# Altium PCB Peripheral_Processor_PCB_V2.PcbDoc (part 3 of 3)
Units mil, origin at the board's own origin, x right, y up, seen from the top; angles counter-clockwise.
Board outline 5600 x 4000 mil, 4 copper layers (Top Layer, Plane(Gnd), Plane(Power), Bottom Layer), stack 23.756 mil thick; 207 components, 234 nets, 739 pads, 214 vias.
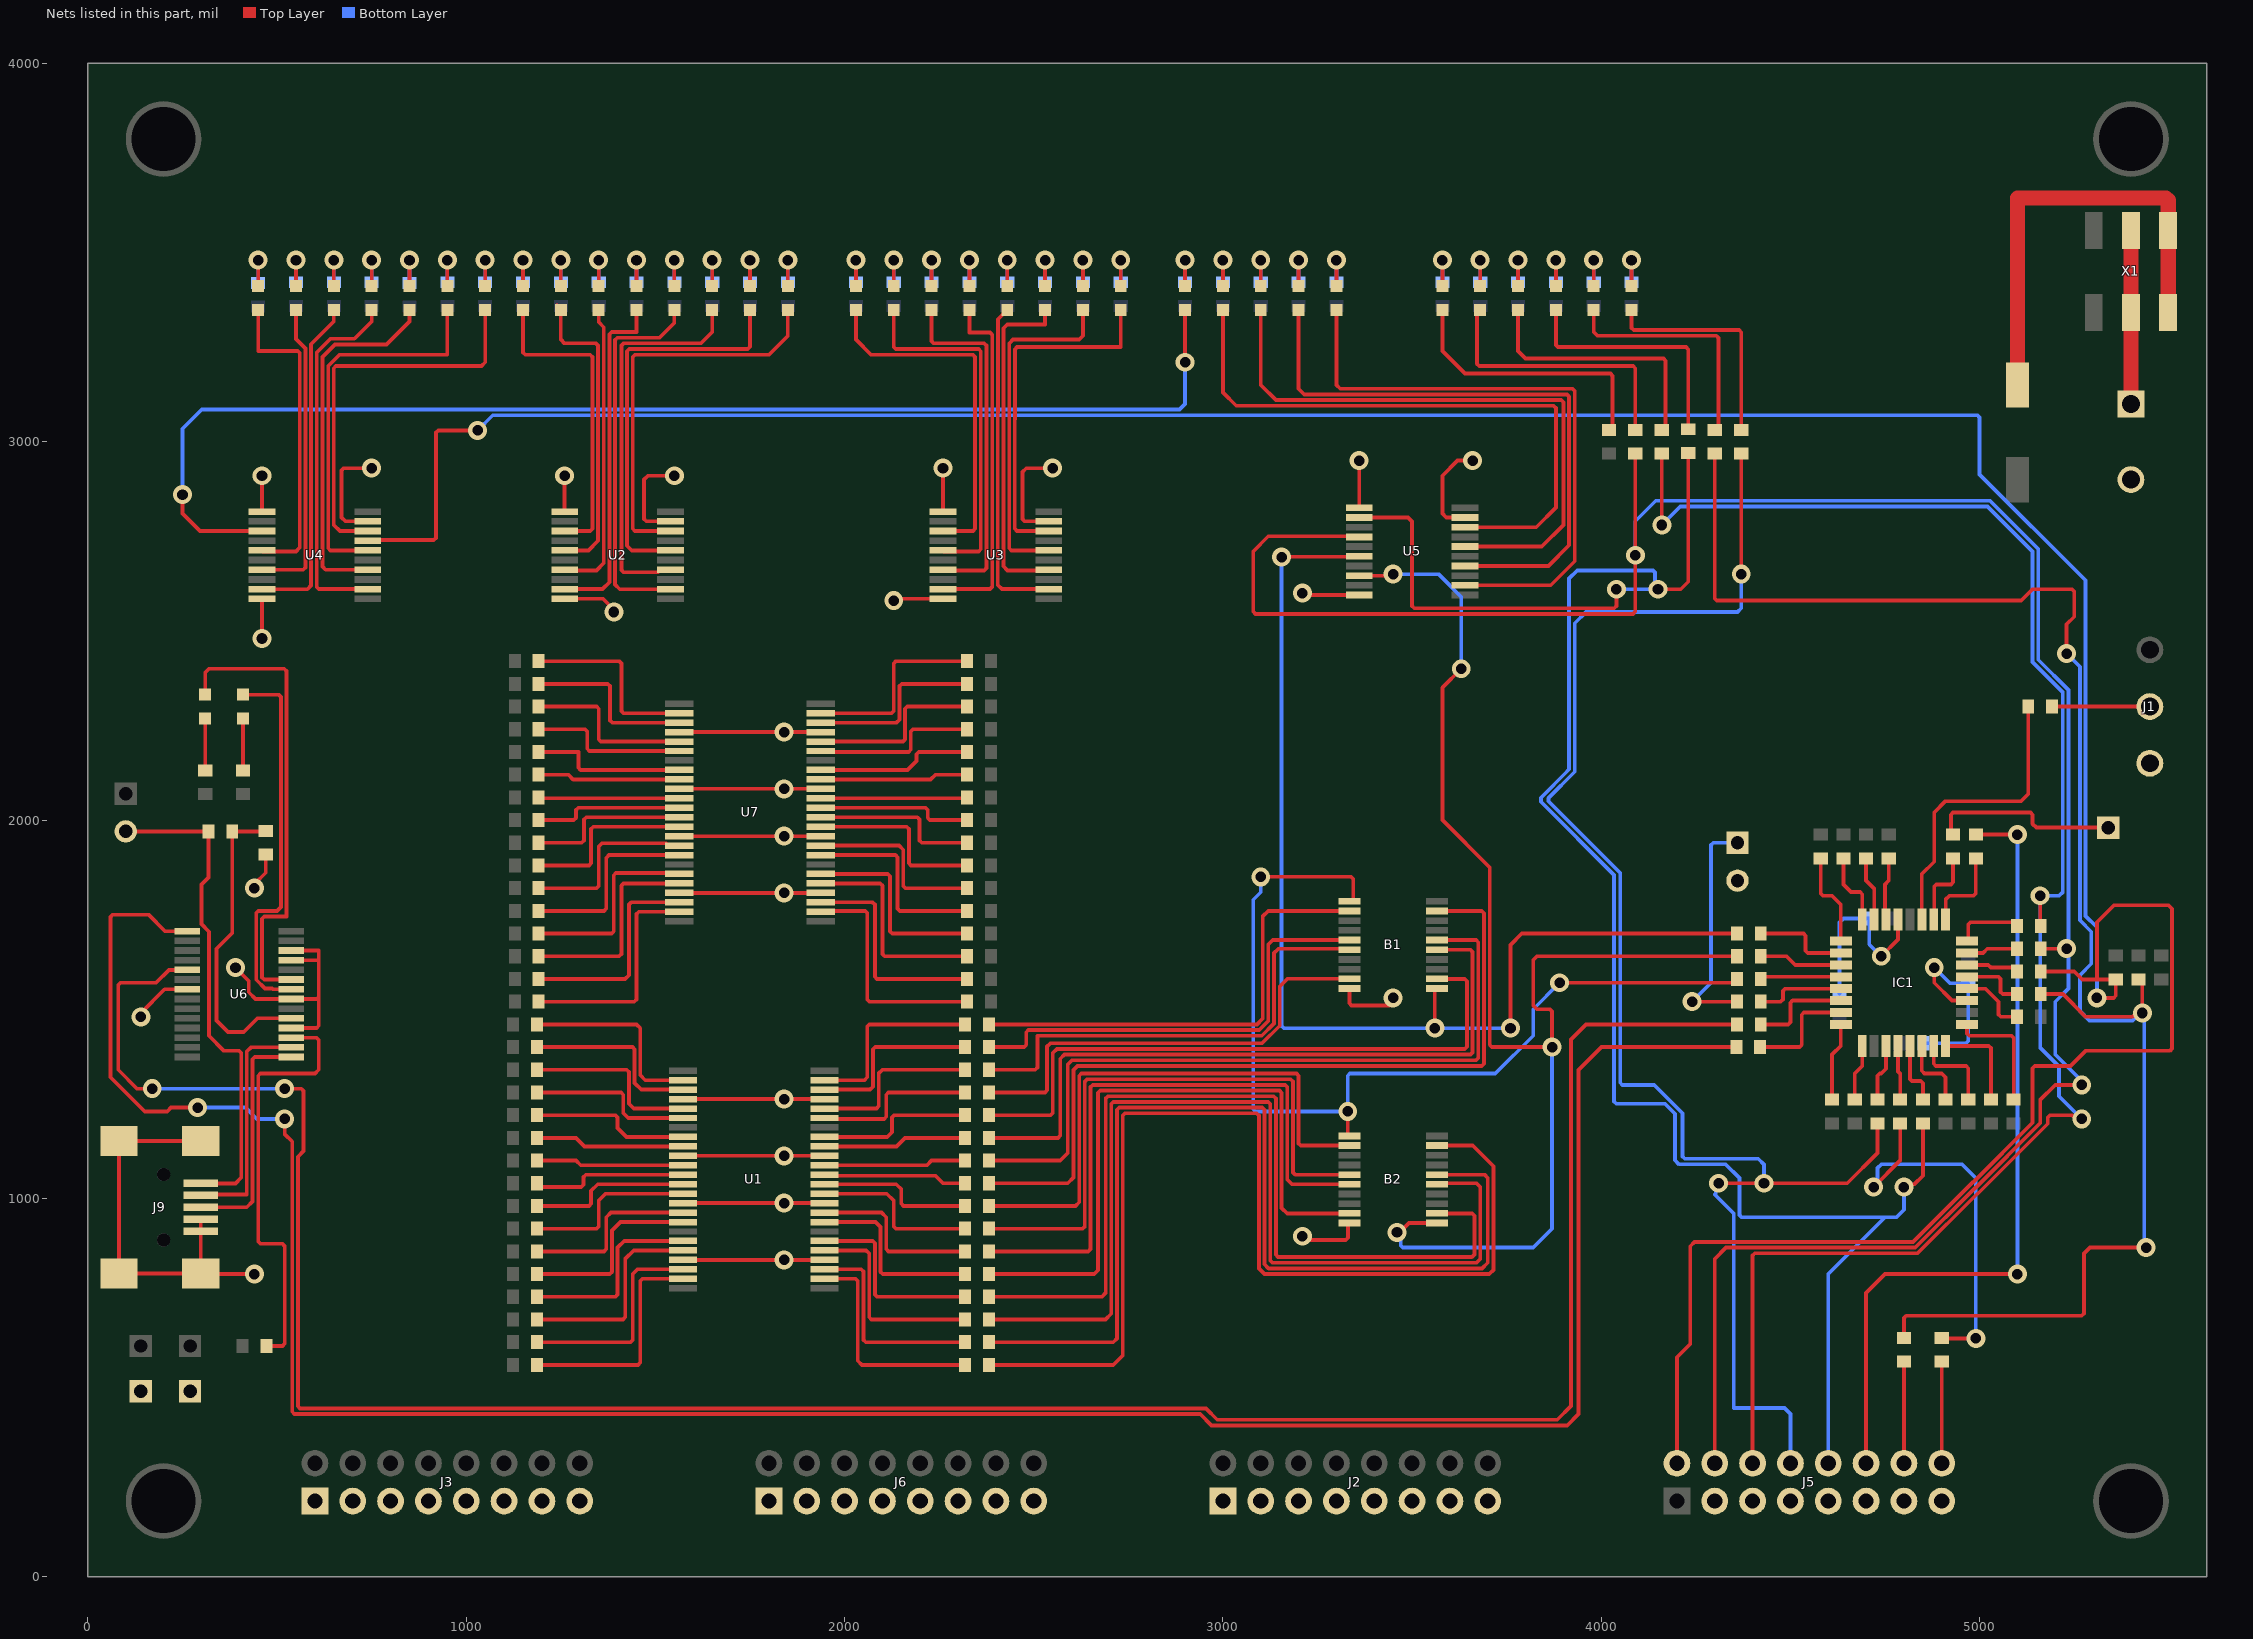
[diagram p4: the nets of this part, all layers, seen from the top]

## Via types
v1: diameter 50, hole 28, Top Layer to Bottom Layer, 214 vias

## Nets (pads, with @x,y where several pads share a name; then routed paths per layer and width w, separated by ;. In a path a pad name is that pad's centre, name@x,y a point inside that pad or via, vN(x,y) a via of type N, cw(c..) or ccw(c..) an arc to the next point about the centre after c; other vN are vias at no path point) (continued)
GND: B1.10 B2.10 C8.2 C9.2 C10.2 C11.2 IC1.19 IC1.29 J1.3 J2.1 J2.3 J2.5 J2.7 J2.9 J2.11 J2.13 J2.15 J3.1 J3.3 J3.5 J3.7 J3.9 J3.11 J3.13 J3.15 J4.2 J5.3 J5.5 J5.7 J5.9 J5.11 J5.13 J5.15 J6.1 J6.3 J6.5 J6.7 J6.9 J6.11 J6.13 J6.15 J7.2 J9.4 J9.5 J9.6 J9.7 J9.8 J9.9 R106.1 TP8.1 TP9.1 U1.4 U1.10 U1.15 U1.21 U1.28 U1.34 U1.39 U1.45 U2.1 U2.10 U2.19 U3.1 U3.10 U3.19 U4.1 U4.10 U4.19 U5.1 U5.10 U5.19 U6.7 U6.18 U6.21 U6.25 U6.26 U7.4 U7.10 U7.15 U7.21 U7.28 U7.34 U7.39 U7.45 | length 8432.5
  Top Layer w10: v1(140,1480) 140,1490 202.8,1552.8 U6.7@262.2,1552.8 ; J9.4@298.43,945.12 J9.5@298.43,913.62 J9.6@298.43,801.42 ; J9.9@298.43,1151.81 J9.8@81.89,1151.81 J9.7@81.89,801.42 J9.6@298.43,801.42 ; v1@390,1609.18 v1(390,1610) 425,1575 425,1545 442.8,1527.2 U6.21@537.8,1527.2 604.14,1527.2 610,1533.06 ; v1(440,800) 299.84,800 J9.6@298.43,801.42 ; v1(440,1820) 440,1830.82 470,1860.82 R106.1@470,1908.5 ; v1(460,2480) 460.24,2480.24 U4.10@460.24,2584.84 ; v1(460,2910) 460.24,2909.76 U4.1@460.24,2815.16 ; U6.18@537.8,1450.43 604.14,1450.43 610,1456.29 610,1533.06 ; U6.25@537.8,1629.57 609.57,1629.57 610,1630 ; U6.26@537.8,1655.16 610,1655.16 610,1630 ; U4.19@739.76,2789.57 680.43,2789.57 670,2800 670,2924.14 675.86,2930 v1(750,2930) ; v1(1260,2910) 1260,2815.39 U2.1@1260.24,2815.16 ; U2.10@1260.24,2584.84 1361.2,2584.84 1390,2556.05 v1(1390,2550) ; U2.19@1539.76,2789.57 1475.86,2789.57 1470,2795.42 1470,2900 1480,2910 v1(1550,2910) ; U7.45@1562.99,1807.48 v1(1840,1807.48) U7.4@1937.01,1807.48 ; U7.39@1562.99,1957.48 v1(1840,1957.48) U7.10@1937.01,1957.48 ; U7.34@1562.99,2082.52 v1(1840,2082.52) U7.15@1937.01,2082.52 ; U7.28@1562.99,2232.52 v1(1840,2232.52) U7.21@1937.01,2232.52 ; U1.21@1572.99,837.48 v1(1840,837.48) U1.28@1947.01,837.48 ; U1.15@1572.99,987.48 v1(1840,987.48) U1.34@1947.01,987.48 ; U1.10@1572.99,1112.52 v1(1840,1112.52) U1.39@1947.01,1112.52 ; U1.4@1572.99,1262.52 v1(1840,1262.52) U1.45@1947.01,1262.52 ; v1(2130,2580) 2134.84,2584.84 U3.10@2260.24,2584.84 ; v1(2260,2930) 2260.24,2929.76 U3.1@2260.24,2815.16 ; U3.19@2539.76,2789.57 2475.86,2789.57 2470,2795.42 2470,2920 2480,2930 v1(2550,2930) ; v1(3210,900) 3210,895.86 3215.86,890 3324.84,890 3330.7,895.86 3330.7,930.98 3334.33,934.61 B2.10@3334.33,934.84 ; v1(3210,2600) 3215.86,2594.14 3224.14,2594.14 3224.84,2594.84 U5.10@3360.24,2594.84 ; B1.10@3334.33,1554.84 3334.33,1515.86 3340.19,1510 3440,1510 3450,1520 v1(3450,1530) ; v1(3360,2950) 3360.24,2949.76 U5.1@3360.24,2825.16 ; U5.19@3639.76,2799.57 3590.43,2799.57 3580,2810 3580,2910 3620,2950 v1(3660,2950) ; v1(4740,1640) 4784.25,1684.25 IC1.29@4784.25,1736.85 ; v1(4880,1610) 4880,1570 4927.24,1522.76 IC1.19@4966.85,1522.76 ; 610,1533.06 610,1630
  Bottom Layer w10: C10.2@4630,1541.5 4630,1730 4640,1740 C11.2@4708.5,1740 4708.5,1671.5 v1(4740,1640) ; C9.2@4851.5,1410 4964.14,1410 4970,1415.86 C8.2@4970,1568.5 4921.5,1568.5 v1(4880,1610)
High_Address_Clk: B2.11 R24.1 U5.8 | length 3591.1
  Top Layer w10: U5.8@3360.24,2646.02 3446.02,2646.02 v1(3450,2650) ; v1(3460,910) 3466.88,910 3491.73,934.84 B2.11@3565.67,934.84 ; v1(3630,2400) 3580,2350 3580,2000 3705,1875 3705,1405.86 3710.86,1400 v1(3870,1400) 3870,1494.14 3864.14,1500 3830,1500 3820,1510 3820,1630 3830,1640 R24.1@4358.5,1640
  Bottom Layer w10: v1(3450,2650) 3570,2650 3630,2590 v1(3630,2400) ; v1(3460,910) 3470,900 3470,875.86 3475.86,870 3820,870 3870,920 v1(3870,1400)
HostReset#: R2.1 R29.2 R56.1 R97.1 | length 4571.7
  Top Layer w10: R97.1@4300,2968.5 4300,2585.86 4305.86,2580 5110,2580 5140,2610 5244.14,2610 5250,2604.14 5250,2537.48 5230,2517.48 v1(5230,2440) ; R56.1@4800,631.5 4800,684.14 4805.86,690 5270,690 5275.86,695.86 5275.86,854.14 5291.72,870 v1(5440,870) ; R29.2@5161.5,1540 5220,1540 5280,1480 5404.14,1480 5406.49,1482.35 5422.35,1482.35 v1(5430,1490) v1@5420,1500 ; R2.1@5420,1578.5 5430,1568.5 5430,1508.48 v1@5421.52,1500
  Bottom Layer w10: v1(5230,2440) 5265,2405 5265,1735 5295,1705 5295,1620 5265,1590 5265,1495 5290,1470 5404.14,1470 5419.14,1485 v1@5425,1485 ; v1(5430,1490) v1@5425,1485 ; v1(5440,870) 5435,875 5435,1475 v1@5425,1485
JLink_Mode: J5.8 R113.2 R141.1 | length 4210.1
  Top Layer w10: v1(4310,1040) 4650,1040 4730,1120 R113.2@4730,1198.5 ; v1(4370,2650) R141.1@4370,2968.5
  Bottom Layer w10: v1(4310,1040) 4302.35,1032.35 4302.35,1012.35 4300,1010 4350,960 4350,445.86 4484.14,445.86 4500,430 J5.8@4500,300 ; v1(4370,2650) 4370,2560 4360,2550 3960,2550 3930,2520 3930,2127.57 3860.36,2057.93 3860.36,2049.64 4050,1860 4050,1305.86 4055.86,1300 4140,1300 4215,1225 4215,1110.86 4220.86,1105 4415,1105 4430,1090 v1(4430,1040)
Latch_CLR: B1.1 B2.1 R28.1 | length 2524.6
  Top Layer w10: v1(3100,1850) 3338.35,1850 3344.21,1844.14 3344.21,1789.02 3340.35,1785.16 B1.1@3334.33,1785.16 ; v1(3330,1230) 3330,1169.02 3333.86,1165.16 B2.1@3334.33,1165.16 ; v1(3890,1570) 4348.5,1570 R28.1@4358.5,1580
  Bottom Layer w10: v1(3100,1850) 3100,1809.18 3080,1789.18 3080,1235.86 3085.86,1230 v1(3330,1230) 3330,1324.14 3335.86,1330 3720,1330 3820,1430 3820,1500 v1(3890,1570)
Low_Address_Clk: B1.11 R20.1 U5.6 | length 2991.9
  Top Layer w10: v1(3155,2695) 3156.1,2696.1 3359.13,2696.1 U5.6@3360.24,2697.2 ; v1(3560,1450) 3560,1550.98 3563.86,1554.84 B1.11@3565.67,1554.84 ; v1(3760,1450) 3760,1670 3790,1700 R20.1@4358.5,1700
  Bottom Layer w10: v1(3155,2695) 3155,1455.86 3160.86,1450 v1(3560,1450) v1(3760,1450)
NetB1_2: B1.2 R6.1 | length 1235.1
  Top Layer w10: R6.1@2381.5,1460 3090,1460 3105,1475 3105,1745 3119.57,1759.57 B1.2@3334.33,1759.57
NetB1_5: B1.5 R10.1 | length 1208
  Top Layer w10: R10.1@2381.5,1400 2474.14,1400 2480,1405.86 2480,1439.14 2485.86,1445 3096.21,1445 3120,1468.79 3120,1671.08 3131.72,1682.8 B1.5@3334.33,1682.8
NetB1_6: B1.6 R14.1 | length 1244.6
  Top Layer w10: R14.1@2381.5,1340 2504.14,1340 2510,1345.86 2510,1430 3102.43,1430 3135,1462.57 3135,1648.28 3146.72,1660 3331.54,1660 B1.6@3334.33,1657.2
NetB1_9: B1.9 R18.1 | length 1205.6
  Top Layer w10: R18.1@2381.5,1280 2529.5,1280 2535.36,1285.86 2535.36,1401.21 2544.14,1410 3103.64,1410 3150,1456.36 3150,1560 3170.43,1580.43 B1.9@3334.33,1580.43
NetB1_12: B1.12 R22.1 | length 1686.4
  Top Layer w10: R22.1@2381.5,1220 2544.5,1220 2550.36,1225.86 2550.36,1384.14 2561.21,1395 3639.14,1395 3645,1400.86 3645,1574.14 3639.14,1580 3566.1,1580 B1.12@3565.67,1580.43
NetB1_15: B1.15 R26.1 | length 1853.4
  Top Layer w10: R26.1@2381.5,1160 2564.14,1160 2570,1165.86 2570,1369.14 2580.86,1380 3654.14,1380 3660,1385.86 3660,1651.35 3654.14,1657.2 B1.15@3565.67,1657.2
NetB1_16: B1.16 R30.1 | length 1960.7
  Top Layer w10: R30.1@2381.5,1100 2570,1100 2590,1120 2590,1354.14 2600.86,1365 3669.14,1365 3675,1370.86 3675,1676.94 3669.14,1682.8 B1.16@3565.67,1682.8
NetB1_19: B1.19 R34.1 | length 2130.4
  Top Layer w10: R34.1@2381.5,1040 2590,1040 2605,1055 2605,1339.14 2615.86,1350 3684.14,1350 3690,1355.86 3690,1753.71 3684.14,1759.57 B1.19@3565.67,1759.57
NetB2_2: B2.2 R36.1 | length 1477.1
  Top Layer w10: R36.1@2381.5,980 2610,980 2620,990 2620,1324.14 2625.86,1330 3194.14,1330 3200,1324.14 3200,1145.42 3205.86,1139.57 B2.2@3334.33,1139.57
NetB2_5: B2.5 R38.1 | length 1586.3
  Top Layer w10: R38.1@2381.5,920 2629.14,920 2635,925.86 2635,1309.14 2640.86,1315 3179.14,1315 3185,1309.14 3185,1068.65 3190.86,1062.8 B2.5@3334.33,1062.8
NetB2_6: B2.6 R40.1 | length 1637.8
  Top Layer w10: R40.1@2381.5,860 2644.14,860 2650,865.86 2650,1294.14 2655.86,1300 3164.14,1300 3170,1294.14 3170,1050 3182.8,1037.2 B2.6@3334.33,1037.2
NetB2_9: B2.9 R43.1 | length 1741.5
  Top Layer w10: R43.1@2381.5,800 2660,800 2670,810 2670,1279.14 2675.86,1285 3149.14,1285 3155,1279.14 3155,975 3170,960 3333.9,960 B2.9@3334.33,960.43
NetB2_12: B2.12 R46.1 | length 2429.3
  Top Layer w10: R46.1@2381.5,740 2680,740 2690,750 2690,1264.14 2695.86,1270 3134.14,1270 3140,1264.14 3140,850.86 3145.86,845 3657.93,845 3665,852.07 3665,954.14 3659.14,960 3566.1,960 B2.12@3565.67,960.43
NetB2_15: B2.15 R49.1 | length 2593.2
  Top Layer w10: R49.1@2381.5,680 2690,680 2705,695 2705,1249.14 2710.86,1255 3119.14,1255 3125,1249.14 3125,835.86 3130.86,830 3670,830 3680,840 3680,1030 3670,1040 3568.46,1040 B2.15@3565.67,1037.2
NetB2_16: B2.16 R52.1 | length 2712.7
  Top Layer w10: R52.1@2381.5,620 2710,620 2720,630 2720,1234.14 2725.86,1240 3104.14,1240 3110,1234.14 3110,825.86 3120.86,815 3685,815 3700,830 3700,1054.14 3691.35,1062.8 B2.16@3565.67,1062.8
NetB2_19: B2.19 R54.1 | length 2843.8
  Top Layer w10: R54.1@2381.5,560 2710,560 2735,585 2735,1219.14 2740.86,1225 3089.14,1225 3095,1219.14 3095,815 3110,800 3704.14,800 3715,810.86 3715,1085 3660.43,1139.57 B2.19@3565.67,1139.57
NetD1_2: D1.2 X1.3 X1.4 | length 1191.9
  Top Layer w10: D1.2@5099.75,3150.25 D1.2@5100,3150 ; 5492.57,3644.14 5498.43,3638.28
  Top Layer w40: D1.2@5099.75,3150.25 5099.75,3644.14 5196.02,3644.14 5492.57,3644.14 ; X1.3@5498.43,3341.73 X1.4@5498.43,3558.27 5498.43,3638.28
NetIC1_1: IC1.1 R16.2 | length 254.4
  Top Layer w10: R16.2@4580,1898.5 4580,1805.86 4585.86,1800 4610,1800 4633.15,1776.85 IC1.1@4633.15,1680.24
NetIC1_2: IC1.2 R20.2 | length 256.1
  Top Layer w10: R20.2@4421.5,1700 4534.14,1700 4540,1694.14 4540,1654.6 4545.86,1648.74 IC1.2@4633.15,1648.74
NetIC1_3: IC1.3 R24.2 | length 221.1
  Top Layer w10: R24.2@4421.5,1640 4490,1640 4512.76,1617.24 IC1.3@4633.15,1617.24
NetIC1_4: IC1.4 R28.2 | length 214
  Top Layer w10: R28.2@4421.5,1580 4427.24,1585.75 IC1.4@4633.15,1585.75
NetIC1_5: IC1.5 R32.2 | length 239
  Top Layer w10: R32.2@4421.5,1520 4474.14,1520 4480,1525.86 4480,1548.39 4485.86,1554.25 IC1.5@4633.15,1554.25
NetIC1_6: IC1.6 R42.2 | length 267.5
  Top Layer w10: R42.2@4421.5,1460 4494.14,1460 4500,1465.86 4500,1516.9 4505.86,1522.76 IC1.6@4633.15,1522.76
NetIC1_7: IC1.7 R45.2 | length 297.5
  Top Layer w10: R45.2@4420,1400 4524.14,1400 4530,1405.86 4530,1485.4 4535.86,1491.26 IC1.7@4633.15,1491.26
NetIC1_8: IC1.8 R48.2 | length 207.9
  Top Layer w10: R48.2@4610,1261.5 4610,1380 4633.15,1403.15 IC1.8@4633.15,1459.76
NetIC1_9: IC1.9 R51.2 | length 149.8
  Top Layer w10: R51.2@4670,1261.5 4670,1330 4689.76,1349.76 IC1.9@4689.76,1403.15
NetIC1_11: IC1.11 R113.1 | length 153.5
  Top Layer w10: R113.1@4730,1261.5 4730,1324.14 4735.86,1330 4740,1330 4752.76,1342.76 IC1.11@4752.76,1403.15
NetIC1_12: IC1.12 R112.1 | length 144
  Top Layer w10: IC1.12@4784.25,1403.15 4784.25,1335.75 4790,1330 R112.1@4790,1261.5
NetIC1_13: IC1.13 R111.1 | length 169
  Top Layer w10: IC1.13@4815.75,1403.15 4815.75,1315.86 4821.61,1310 4844.14,1310 4850,1304.14 R111.1@4850,1261.5
NetIC1_14: IC1.14 R110.1 | length 194.3
  Top Layer w10: IC1.14@4847.24,1403.15 4847.24,1337.24 4854.49,1330 4900,1330 4910,1320 R110.1@4910,1261.5
NetIC1_15: IC1.15 R109.1 | length 226.1
  Top Layer w10: IC1.15@4878.74,1403.15 4878.74,1355.86 4884.6,1350 4964.14,1350 4970,1344.14 R109.1@4970,1261.5
NetIC1_16: IC1.16 R108.1 | length 258
  Top Layer w10: IC1.16@4910.24,1403.15 5024.14,1403.15 5030,1397.29 R108.1@5030,1261.5
NetIC1_17: IC1.17 R107.1 | length 314.6
  Top Layer w10: IC1.17@4966.85,1459.76 4966.85,1435.86 4972.71,1430 5084.14,1430 5090,1424.14 R107.1@5090,1261.5
NetIC1_20: IC1.20 R33.1 | length 182.4
  Top Layer w10: IC1.20@4966.85,1554.25 5015.75,1554.25 5050,1520 5050,1485.86 5055.86,1480 R33.1@5098.5,1480
NetIC1_21: IC1.21 R29.1 | length 170.5
  Top Layer w10: IC1.21@4966.85,1585.75 5049.56,1585.75 5055.42,1579.89 5055.42,1545.86 5061.28,1540 R29.1@5098.5,1540
NetIC1_22: IC1.22 R25.1 | length 138.8
  Top Layer w10: IC1.22@4966.85,1617.24 5022.76,1617.24 5030,1610 5088.5,1610 R25.1@5098.5,1600
NetIC1_23: IC1.23 R21.1 | length 136.3
  Top Layer w10: IC1.23@4966.85,1648.74 5008.74,1648.74 5020,1660 R21.1@5098.5,1660
NetIC1_24: IC1.24 R17.1 | length 180.3
  Top Layer w10: IC1.24@4966.85,1680.24 4970,1683.39 4970,1724.14 4975.86,1730 5088.5,1730 R17.1@5098.5,1720
NetIC1_25: IC1.25 R13.1 | length 232
  Top Layer w10: IC1.25@4910.24,1736.85 4910.24,1789.76 4920.47,1800 4984.14,1800 4990,1805.86 R13.1@4990,1898.5
NetIC1_26: IC1.26 R9.1 | length 205.3
  Top Layer w10: IC1.26@4878.74,1736.85 4880,1738.11 4880,1824.14 4885.86,1830 4924.14,1830 4930,1835.86 R9.1@4930,1898.5
NetIC1_27: IC1.27 R5.1 | length 796.8
  Top Layer w10: IC1.27@4847.24,1736.85 4847.24,1857.24 4880,1890 4880,2020 4910,2050 5110,2050 5128.5,2068.5 R5.1@5128.5,2300
NetIC1_30: IC1.30 R4.2 | length 166.9
  Top Layer w10: IC1.30@4752.76,1736.85 4750,1739.61 4750,1830 4760,1840 R4.2@4760,1898.5
NetIC1_31: IC1.31 R8.2 | length 170.5
  Top Layer w10: R8.2@4700,1898.5 4700,1840 4721.26,1818.74 IC1.31@4721.26,1736.85
NetIC1_32: IC1.32 R12.2 | length 196.6
  Top Layer w10: R12.2@4640,1898.5 4640,1830 4660,1810 4684.14,1810 4690,1804.14 4690,1737.09 IC1.32@4689.76,1736.85
NetJ5_14: J5.14 R56.2 | length 268.5
  Top Layer w10: J5.14@4800,300 R56.2@4800,568.5
NetJ5_16: J5.16 R57.2 | length 268.5
  Top Layer w10: J5.16@4900,300 R57.2@4900,568.5
NetJ7_1: J7.1 X1.2 X1.5 | length 458.3
  Top Layer w40: J7.1@5400,3100 X1.2@5400,3341.73 X1.5@5400,3558.27
NetJ8_2: J8.2 J9.1 R105.2 | length 1321.3
  Top Layer w10: J8.2@100,1970 R105.2@318.5,1970 318.5,1848.5 300,1830 300,1725.01 320,1705.01 320,1430 360,1390 400,1390 405,1385 405,1054.61 390,1039.61 J9.1@298.43,1039.61
NetLED1_1: LED1.1 U2.18 | length 1058.1
  Top Layer w10: U2.18@1539.76,2763.98 1445.86,2763.98 1440,2769.83 1440,3224.14 1445.86,3230 1800,3230 1850,3280 LED1.1@1850,3348.5
NetLED1_2: LED1.2 R58.1 | length 127
  Top Layer w10: LED1.2@1850,3411.5 v1(1850,3480)
  Bottom Layer w10: R58.1@1850,3421.5 v1(1850,3480)
NetLED2_1: LED2.1 U2.16 | length 1061.5
  Top Layer w10: U2.16@1539.76,2712.8 1437.2,2712.8 1425,2725 1425,3239.14 1430.86,3245 1744.14,3245 1750,3250.86 LED2.1@1750,3348.5
NetLED2_2: LED2.2 R59.1 | length 127
  Top Layer w10: LED2.2@1750,3411.5 v1(1750,3480)
  Bottom Layer w10: R59.1@1750,3421.5 v1(1750,3480)
NetLED3_1: LED3.1 U2.14 | length 1041.7
  Top Layer w10: U2.14@1539.76,2661.61 1513.19,2661.61 1506.46,2654.88 1415.86,2654.88 1410,2660.74 1410,3254.14 1415.86,3260 1620,3260 1650,3290 LED3.1@1650,3348.5
NetLED3_2: LED3.2 R60.1 | length 127
  Top Layer w10: LED3.2@1650,3411.5 v1(1650,3480)
  Bottom Layer w10: R60.1@1650,3421.5 v1(1650,3480)
NetLED4_1: LED4.1 U2.12 | length 1007.7
  Top Layer w10: U2.12@1539.76,2610.43 1539.33,2610 1405.86,2610 1393.47,2622.39 1393.47,3269.14 1399.33,3275 1510.52,3275 1550,3314.48 LED4.1@1550,3348.5
NetLED4_2: LED4.2 R61.1 | length 127
  Top Layer w10: LED4.2@1550,3411.5 v1(1550,3480)
  Bottom Layer w10: R61.1@1550,3421.5 v1(1550,3480)
NetLED5_1: LED5.1 U2.9 | length 913.8
  Top Layer w10: U2.9@1260.24,2610.43 1360.43,2610.43 1378.47,2628.47 1378.47,3284.14 1384.33,3290 1450,3290 LED5.1@1450,3348.5
NetLED5_2: LED5.2 R62.1 | length 127
  Top Layer w10: LED5.2@1450,3411.5 v1(1450,3480)
  Bottom Layer w10: R62.1@1450,3421.5 v1(1450,3480)
NetLED6_1: LED6.1 U2.7 | length 786.7
  Top Layer w10: U2.7@1260.24,2661.61 1261.85,2660 1344.14,2660 1363.47,2679.33 1363.47,3302.74 1350,3316.21 LED6.1@1350,3348.5
NetLED6_2: LED6.2 R63.1 | length 127
  Top Layer w10: LED6.2@1350,3411.5 v1(1350,3480)
  Bottom Layer w10: R63.1@1350,3421.5 v1(1350,3480)
NetLED7_1: LED7.1 U2.5 | length 828.9
  Top Layer w10: LED7.1@1250.75,3349.25 1240,3360 1240,3358.5 LED7.1@1250,3348.5 1250,3270 1260,3260 1342.61,3260 1348.47,3254.14 1348.47,2738.47 1322.8,2712.8 U2.5@1260.24,2712.8
NetLED7_2: LED7.2 R64.1 | length 127
  Top Layer w10: LED7.2@1250,3411.5 v1(1250,3480)
  Bottom Layer w10: R64.1@1250,3421.5 v1(1250,3480)
NetLED8_1: LED8.1 U2.3 | length 830.9
  Top Layer w10: LED8.1@1150,3348.5 1150,3235.86 1155.86,3230 1327.61,3230 1333.47,3224.14 1333.47,2769.83 1327.61,2763.98 U2.3@1260.24,2763.98
NetLED8_2: LED8.2 R65.1 | length 127
  Top Layer w10: LED8.2@1150,3411.5 v1(1150,3480)
  Bottom Layer w10: R65.1@1150,3421.5 v1(1150,3480)
NetLED9_1: LED9.1 U3.18 | length 947.4
  Top Layer w10: U3.18@2539.76,2763.98 2455.86,2763.98 2450,2769.83 2450,3060 2450.11,3060.11 2450.11,3244.14 2455.97,3250 2730,3250 LED9.1@2730,3348.5
NetLED9_2: LED9.2 R66.1 | length 127
  Top Layer w10: LED9.2@2730,3411.5 v1(2730,3480)
  Bottom Layer w10: R66.1@2730,3421.5 v1(2730,3480)
NetLED10_1: LED10.1 U3.16 | length 920.3
  Top Layer w10: U3.16@2539.76,2712.8 2440.86,2712.8 2435,2718.65 2435,3066.21 2435.11,3066.32 2435.11,3260 2445.11,3270 2620,3270 2630,3280 LED10.1@2630,3348.5
NetLED10_2: LED10.2 R67.1 | length 127
  Top Layer w10: LED10.2@2630,3411.5 v1(2630,3480)
  Bottom Layer w10: R67.1@2630,3421.5 v1(2630,3480)
NetLED11_1: LED11.1 U3.14 | length 906.7
  Top Layer w10: LED11.1@2530,3348.5 2530,3310 2430,3310 2420.11,3300.11 2420.11,3072.54 2420,3072.43 2420,2670.86 2430.86,2660 2538.15,2660 U3.14@2539.76,2661.61
NetLED11_2: LED11.2 R68.1 | length 141.1
  Top Layer w10: LED11.2@2520,3421.5 LED11.2@2530,3411.5 v1(2530,3480)
  Bottom Layer w10: R68.1@2530,3421.5 v1(2530,3480)
NetLED12_1: LED12.1 U3.12 | length 876.8
  Top Layer w10: LED12.1@2430,3348.5 2405.11,3323.61 2405.11,3078.75 2405,3078.64 2405,2621.29 2415.86,2610.43 U3.12@2539.76,2610.43
NetLED12_2: LED12.2 R69.1 | length 127
  Top Layer w10: LED12.2@2430,3411.5 v1(2430,3480)
  Bottom Layer w10: R69.1@2430,3421.5 v1(2430,3480)
NetLED13_1: LED13.1 U3.9 | length 921
  Top Layer w10: U3.9@2260.24,2610.43 2384.14,2610.43 2390,2616.29 2390,3283.02 2384.14,3288.88 2330,3288.88 LED13.1@2330,3348.5
NetLED13_2: LED13.2 R70.1 | length 127
  Top Layer w10: LED13.2@2330,3411.5 v1(2330,3480)
  Bottom Layer w10: R70.1@2330,3421.5 v1(2330,3480)
NetLED14_1: LED14.1 U3.7 | length 938.6
  Top Layer w10: LED14.1@2230,3348.5 2230,3265.86 2235.86,3260 2369.14,3260 2375,3254.14 2375,2665.86 2369.14,2660 2261.85,2660 U3.7@2260.24,2661.61
NetLED14_2: LED14.2 R71.1 | length 127
  Top Layer w10: LED14.2@2230,3411.5 v1(2230,3480)
  Bottom Layer w10: R71.1@2230,3421.5 v1(2230,3480)
NetLED15_1: LED15.1 U3.5 | length 959.6
  Top Layer w10: LED15.1@2130,3348.5 2130,3250 2135,3245 2354.14,3245 2360,3239.14 2360,2715.86 2354.14,2710 2263.03,2710 U3.5@2260.24,2712.8
NetLED15_2: LED15.2 R72.1 | length 127
  Top Layer w10: LED15.2@2130,3411.5 v1(2130,3480)
  Bottom Layer w10: R72.1@2130,3421.5 v1(2130,3480)
NetLED16_1: LED16.1 U3.3 | length 954
  Top Layer w10: LED16.1@2030,3348.5 2030,3270 2070,3230 2339.14,3230 2345,3224.14 2345,2769.83 2339.14,2763.98 U3.3@2260.24,2763.98
NetLED16_2: LED16.2 R73.1 | length 127
  Top Layer w10: LED16.2@2030,3411.5 v1(2030,3480)
  Bottom Layer w10: R73.1@2030,3421.5 v1(2030,3480)
NetLED17_1: LED17.1 U4.18 | length 1055.6
  Top Layer w10: U4.18@739.76,2763.98 666.02,2763.98 650,2780 650,3194.14 655.86,3200 1040,3200 1050,3210 LED17.1@1050,3348.5
NetLED17_2: LED17.2 R74.1 | length 127
  Top Layer w10: LED17.2@1050,3411.5 v1(1050,3480)
  Bottom Layer w10: R74.1@1050,3421.5 v1(1050,3480)
NetLED18_1: LED18.1 U4.16 | length 1034.7
  Top Layer w10: U4.16@739.76,2712.8 640.86,2712.8 635,2718.65 635,3200.36 664.64,3230 950,3230 LED18.1@950,3348.5
NetLED18_2: LED18.2 R75.1 | length 127
  Top Layer w10: LED18.2@950,3411.5 v1(950,3480)
  Bottom Layer w10: R75.1@950,3421.5 v1(950,3480)
NetLED19_1: LED19.1 U4.14 | length 976.9
  Top Layer w10: U4.14@739.76,2661.61 628.39,2661.61 620,2670 620,3224.14 652.84,3256.98 789.23,3256.98 850,3317.76 LED19.1@850,3348.5
NetLED19_2: LED19.2 R76.1 | length 128.5
  Top Layer w10: LED19.2@850,3411.5 v1(850,3480)
  Bottom Layer w10: R76.1@850,3420 v1(850,3480)
NetLED20_1: LED20.1 U4.12 | length 966.6
  Top Layer w10: U4.12@739.76,2610.43 610.86,2610.43 605,2616.29 605,3236.21 640.77,3271.98 704.23,3271.98 750,3317.76 LED20.1@750,3348.5
NetLED20_2: LED20.2 R77.1 | length 127
  Top Layer w10: LED20.2@750,3411.5 v1(750,3480)
  Bottom Layer w10: R77.1@750,3421.5 v1(750,3480)
NetLED21_1: LED21.1 U4.9 | length 887.4
  Top Layer w10: U4.9@460.24,2610.43 460.67,2610 580,2610 590,2620 590,3257.76 650,3317.76 LED21.1@650,3348.5
NetLED21_2: LED21.2 R78.1 | length 127
  Top Layer w10: LED21.2@650,3411.5 v1(650,3480)
  Bottom Layer w10: R78.1@650,3421.5 v1(650,3480)
NetLED22_1: LED22.1 U4.7 | length 808.6
  Top Layer w10: U4.7@460.24,2661.61 569.14,2661.61 575,2667.47 575,3246.21 550,3271.21 LED22.1@550,3348.5
NetLED22_2: LED22.2 R79.1 | length 127
  Top Layer w10: LED22.2@550,3411.5 v1(550,3480)
  Bottom Layer w10: R79.1@550,3421.5 v1(550,3480)
NetLED23_1: LED23.1 U4.5 | length 840.1
  Top Layer w10: LED23.1@450,3348.5 450,3240 554.14,3240 560,3234.14 560,2720 550,2710 463.03,2710 U4.5@460.24,2712.8
NetLED23_2: LED23.2 R80.1 | length 128.5
  Top Layer w10: LED23.2@450,3411.5 v1(450,3480)
  Bottom Layer w10: R80.1@450,3420 v1(450,3480)
NetLED24_1: LED24.1 U4.3 | length 3379.2
  Top Layer w10: v1(250,2860) 250,2810 296.02,2763.98 U4.3@460.24,2763.98 ; v1(2900,3210) LED24.1@2900,3348.5
  Bottom Layer w10: v1(250,2860) 250,3034.14 300.86,3085 2885,3085 2900,3100 v1(2900,3210)
NetLED24_2: LED24.2 R81.1 | length 127
  Top Layer w10: LED24.2@2900,3411.5 v1(2900,3480)
  Bottom Layer w10: R81.1@2900,3421.5 v1(2900,3480)
NetLED25_1: LED25.1 U5.18 | length 1640.4
  Top Layer w10: LED25.1@3000,3348.5 3000,3130 3035,3095 3874.14,3095 3880,3089.14 3880,2825.86 3828.12,2773.98 U5.18@3639.76,2773.98
NetLED25_2: LED25.2 R82.1 | length 127
  Top Layer w10: LED25.2@3000,3411.5 v1(3000,3480)
  Bottom Layer w10: R82.1@3000,3421.5 v1(3000,3480)
NetLED26_1: LED26.1 U5.16 | length 1625.6
  Top Layer w10: LED26.1@3100,3348.5 3100,3150 3140,3110 3894.14,3110 3900,3104.14 3900,2780 3842.8,2722.8 U5.16@3639.76,2722.8
NetLED26_2: LED26.2 R83.1 | length 127
  Top Layer w10: LED26.2@3100,3411.5 v1(3100,3480)
  Bottom Layer w10: R83.1@3100,3421.5 v1(3100,3480)
NetLED27_1: LED27.1 U5.14 | length 1622.9
  Top Layer w10: LED27.1@3200,3348.5 3200,3140 3215,3125 3909.14,3125 3915,3119.14 3915,2726.26 3860.36,2671.61 U5.14@3639.76,2671.61
NetLED27_2: LED27.2 R84.1 | length 127
  Top Layer w10: LED27.2@3200,3411.5 v1(3200,3480)
  Bottom Layer w10: R84.1@3200,3421.5 v1(3200,3480)
NetLED28_1: LED28.1 U5.12 | length 1601.9
  Top Layer w10: LED28.1@3300,3348.5 3300,3150 3310,3140 3924.14,3140 3930,3134.14 3930,2683.86 3866.57,2620.43 U5.12@3639.76,2620.43
NetLED28_2: LED28.2 R85.1 | length 127
  Top Layer w10: LED28.2@3300,3411.5 v1(3300,3480)
  Bottom Layer w10: R85.1@3300,3421.5 v1(3300,3480)
NetLED29_1: LED29.1 R87.2 | length 732.3
  Top Layer w10: LED29.1@3680,3348.5 3671.41,3339.92 3671.41,3205.86 3677.27,3200 4084.14,3200 4090,3194.14 R87.2@4090,3031.5
NetLED29_2: LED29.2 R86.1 | length 127
  Top Layer w10: LED29.2@3680,3411.5 v1(3680,3480)
  Bottom Layer w10: R86.1@3680,3421.5 v1(3680,3480)
NetLED30_1: LED30.1 R94.2 | length 732.6
  Top Layer w10: LED30.1@3580,3348.5 3580,3240 3640,3180 4024.14,3180 4030,3174.14 4030,3041.5 R94.2@4020,3031.5
NetLED30_2: LED30.2 R90.1 | length 127
  Top Layer w10: LED30.2@3580,3411.5 v1(3580,3480)
  Bottom Layer w10: R90.1@3580,3421.5 v1(3580,3480)
NetLED31_1: LED31.1 R141.2 | length 600.1
  Top Layer w10: LED31.1@4080,3348.5 4080,3300.86 4085.86,3295 4364.14,3295 4370,3289.14 R141.2@4370,3031.5
NetLED31_2: LED31.2 R140.1 | length 127
  Top Layer w10: LED31.2@4080,3411.5 v1(4080,3480)
  Bottom Layer w10: R140.1@4080,3421.5 v1(4080,3480)
NetLED33_1: LED33.1 R95.2 | length 696
  Top Layer w10: LED33.1@3780,3348.5 3780,3240 3800,3220 4164.14,3220 4170,3214.14 4170,3041.5 R95.2@4160,3031.5
NetLED33_2: LED33.2 R91.1 | length 127
  Top Layer w10: LED33.2@3780,3411.5 v1(3780,3480)
  Bottom Layer w10: R91.1@3780,3421.5 v1(3780,3480)
NetLED34_1: LED34.1 R96.2 | length 658.6
  Top Layer w10: LED34.1@3880,3348.5 3880,3255.86 3885.86,3250 4224.14,3250 4230,3244.14 R96.2@4230,3032.99
NetLED34_2: LED34.2 R92.1 | length 127
  Top Layer w10: LED34.2@3880,3411.5 v1(3880,3480)
  Bottom Layer w10: R92.1@3880,3421.5 v1(3880,3480)
NetLED36_1: LED36.1 R97.2 | length 641.9
  Top Layer w10: LED36.1@3980,3348.5 3980,3290 3990,3280 4304.14,3280 4310,3274.14 4310,3041.5 R97.2@4300,3031.5
NetLED36_2: LED36.2 R93.1 | length 127
  Top Layer w10: LED36.2@3980,3411.5 v1(3980,3480)
  Bottom Layer w10: R93.1@3980,3421.5 v1(3980,3480)
NetLED37_1: LED37.1 U6.23 | length 1231.8
  Top Layer w10: LED37.1@310,2331.5 310,2390 320,2400 519.14,2400 525,2394.14 525,1745 465.86,1745 460,1739.14 460,1584.24 465.86,1578.39 U6.23@537.8,1578.39
NetLED37_2: LED37.2 R103.1 | length 149
  Top Layer w10: R103.1@310,2131.5 LED37.2@310,2268.5 LED37.2@318.5,2260
NetLED38_1: LED38.1 U6.22 | length 1009
  Top Layer w10: LED38.1@410,2331.5 504.14,2331.5 510,2325.64 510,1770 500,1760 450.86,1760 445,1754.14 445,1578.03 468.03,1555 487.13,1555 489.33,1552.8 U6.22@537.8,1552.8
NetLED38_2: LED38.2 R104.1 | length 137
  Top Layer w10: R104.1@410,2131.5 LED38.2@410,2268.5
NetR6_2: R6.2 U1.47 | length 511.2
  Top Layer w10: U1.47@1947.01,1312.52 2052.52,1312.52 2060,1320 2060,1454.14 2065.86,1460 R6.2@2318.5,1460
NetR7_1: R7.1 U1.2 | length 520.3
  Top Layer w10: R7.1@1186.5,1460 1450,1460 1460,1450 1460,1325.86 1473.34,1312.52 U1.2@1572.99,1312.52
NetR9_2: R9.2 TP1.1 | length 504.1
  Top Layer w10: R9.2@4930,1961.5 4924.14,1967.35 4924.14,2014.14 4930,2020 5134.14,2020 5140,2014.14 5140,1990 5150,1980 TP1.1@5340,1980
NetR10_2: R10.2 U1.46 | length 476.2
  Top Layer w10: U1.46@1947.01,1287.48 2067.48,1287.48 2075,1295 2075,1394.14 2080.86,1400 R10.2@2318.5,1400
NetR11_1: R11.1 U1.3 | length 485.3
  Top Layer w10: R11.1@1186.5,1400 1439.14,1400 1445,1394.14 1445,1305 1462.52,1287.48 U1.3@1572.99,1287.48
NetR14_2: R14.2 U1.44 | length 464.7
  Top Layer w10: U1.44@1947.01,1237.48 2084.14,1237.48 2090,1243.34 2090,1330 2100,1340 R14.2@2318.5,1340
NetR15_1: R15.1 U1.5 | length 478.3
  Top Layer w10: R15.1@1186.5,1340 1424.14,1340 1430,1334.14 1430,1250 1442.52,1237.48 U1.5@1572.99,1237.48
NetR18_2: R18.2 U1.43 | length 435.7
  Top Layer w10: U1.43@1947.01,1212.52 1949.53,1210 2104.14,1210 2110,1215.86 2110,1274.14 2115.86,1280 R18.2@2318.5,1280
NetR19_1: R19.1 U1.6 | length 442.7
  Top Layer w10: R19.1@1186.5,1280 1409.14,1280 1415,1274.14 1415,1225.86 1428.34,1212.52 U1.6@1572.99,1212.52
NetR22_2: R22.2 U1.41 | length 418.2
  Top Layer w10: U1.41@1947.01,1162.52 2112.52,1162.52 2125,1175 2125,1214.14 2130.86,1220 R22.2@2318.5,1220
NetR23_1: R23.1 U1.8 | length 426.9
  Top Layer w10: R23.1@1186.5,1220 1394.14,1220 1400,1214.14 1400,1185.86 1423.34,1162.52 U1.8@1572.99,1162.52
NetR26_2: R26.2 U1.40 | length 380.8
  Top Layer w10: U1.40@1947.01,1137.48 2137.48,1137.48 2160,1160 R26.2@2318.5,1160
NetR27_1: R27.1 U1.9 | length 395.8
  Top Layer w10: R27.1@1186.5,1160 1290,1160 1312.52,1137.48 U1.9@1572.99,1137.48
NetR30_2: R30.2 U1.38 | length 376.7
  Top Layer w10: U1.38@1947.01,1087.48 2217.48,1087.48 2230,1100 R30.2@2318.5,1100
NetR31_1: R31.1 U1.11 | length 391.7
  Top Layer w10: R31.1@1186.5,1100 1290,1100 1302.52,1087.48 U1.11@1572.99,1087.48
NetR34_2: R34.2 U1.37 | length 380.8
  Top Layer w10: U1.37@1947.01,1062.52 1949.53,1060 2240,1060 2260,1040 R34.2@2318.5,1040
NetR35_1: R35.1 U1.12 | length 416.3
  Top Layer w10: R35.1@1186.5,1040 1196.5,1030 1304.14,1030 1310,1035.86 1310,1056.66 1315.86,1062.52 U1.12@1572.99,1062.52
NetR36_2: R36.2 U1.36 | length 417.7
  Top Layer w10: U1.36@1947.01,1037.48 2136.66,1037.48 2150,1024.14 2150,985.86 2155.86,980 R36.2@2318.5,980
NetR37_1: R37.1 U1.13 | length 430.3
  Top Layer w10: R37.1@1186.5,980 1324.14,980 1330,985.86 1330,1020 1347.48,1037.48 U1.13@1572.99,1037.48
NetR38_2: R38.2 U1.35 | length 449.8
  Top Layer w10: U1.35@1947.01,1012.52 2111.62,1012.52 2130,994.14 2130,925.86 2135.86,920 R38.2@2318.5,920
NetR39_1: R39.1 U1.14 | length 464.8
  Top Layer w10: R39.1@1186.5,920 1344.14,920 1350,925.86 1350,994.14 1368.38,1012.52 U1.14@1572.99,1012.52
NetR40_2: R40.2 U1.33 | length 463.3
  Top Layer w10: U1.33@1947.01,962.52 2097.48,962.52 2110,950 2110,865.86 2115.86,860 R40.2@2318.5,860
NetR41_1: R41.1 U1.16 | length 478.3
  Top Layer w10: R41.1@1186.5,860 1364.14,860 1370,865.86 1370,950 1382.52,962.52 U1.16@1572.99,962.52
NetR43_2: R43.2 U1.32 | length 497.7
  Top Layer w10: U1.32@1947.01,937.48 2081.66,937.48 2095,924.14 2095,805.86 2100.86,800 R43.2@2318.5,800
NetR44_1: R44.1 U1.17 | length 507.4
  Top Layer w10: R44.1@1186.5,800 1379.14,800 1385,805.86 1385,915 1407.48,937.48 U1.17@1572.99,937.48
NetR46_2: R46.2 U1.30 | length 512.1
  Top Layer w10: U1.30@1947.01,887.48 2074.14,887.48 2080,881.62 2080,745.86 2085.86,740 R46.2@2318.5,740
NetR47_1: R47.1 U1.19 | length 520.3
  Top Layer w10: R47.1@1186.5,740 1394.14,740 1400,745.86 1400,870 1417.48,887.48 U1.19@1572.99,887.48
NetR49_2: R49.2 U1.29 | length 545.7
  Top Layer w10: U1.29@1947.01,862.52 2056.62,862.52 2065,854.14 2065,685.86 2070.86,680 R49.2@2318.5,680
NetR50_1: R50.1 U1.20 | length 552.4
  Top Layer w10: R50.1@1186.5,680 1414.14,680 1420,685.86 1420,840 1442.52,862.52 U1.20@1572.99,862.52
NetR52_2: R52.2 U1.27 | length 557.2
  Top Layer w10: U1.27@1947.01,812.52 2044.14,812.52 2050,806.66 2050,625.86 2055.86,620 R52.2@2318.5,620
NetR53_1: R53.1 U1.22 | length 568.3
  Top Layer w10: R53.1@1186.5,620 1434.14,620 1440,625.86 1440,800 1452.52,812.52 U1.22@1572.99,812.52
NetR54_2: R54.2 U1.26 | length 589.2
  Top Layer w10: U1.26@1947.01,787.48 2029.14,787.48 2035,781.62 2035,570.86 2045.86,560 R54.2@2318.5,560
NetR55_1: R55.1 U1.23 | length 607.1
  Top Layer w10: R55.1@1186.5,560 1454.14,560 1460,565.86 1460,781.62 1465.86,787.48 U1.23@1572.99,787.48
NetR88_2: R88.2 U7.47 | length 602.1
  Top Layer w10: R88.2@1191.5,1520 1444.14,1520 1450,1525.86 1450,1751.62 1455.86,1757.48 U7.47@1562.99,1757.48
NetR89_1: R89.1 U7.2 | length 620.7
  Top Layer w10: U7.2@1937.01,1757.48 1939.53,1760 2054.14,1760 2060,1754.14 2060,1525.86 2065.86,1520 R89.1@2323.5,1520
NetR98_2: R98.2 U7.46 | length 564.7
  Top Layer w10: R98.2@1191.5,1580 1420,1580 1430,1590 1430,1776.66 1435.86,1782.52 U7.46@1562.99,1782.52
NetR99_1: R99.1 U7.3 | length 582.2
  Top Layer w10: U7.3@1937.01,1782.52 2074.14,1782.52 2080,1776.66 2080,1585.86 2085.86,1580 R99.1@2323.5,1580
NetR100_2: R100.2 U7.44 | length 557.2
  Top Layer w10: R100.2@1191.5,1640 1404.14,1640 1410,1645.86 1410,1826.66 1415.86,1832.52 U7.44@1562.99,1832.52
NetR101_1: R101.1 U7.5 | length 572.2
  Top Layer w10: U7.5@1937.01,1832.52 2094.14,1832.52 2100,1826.66 2100,1645.86 2105.86,1640 R101.1@2323.5,1640
NetR102_1: R102.1 U6.17 | length 1142.5
  Top Layer w10: R102.1@471.5,610 514.14,610 520,615.86 520,874.14 514.14,880 455.86,880 450,885.86 450,1324.14 455.86,1330 600,1330 610,1340 610,1418.98 604.14,1424.84 U6.17@537.8,1424.84
NetR105_1: R105.1 R106.2 U6.19 | length 831.5
  Top Layer w10: R106.2@470,1971.5 468.5,1970 R105.1@381.5,1970 381.5,1701.5 340,1660 340,1470 370,1440 411.9,1440 447.93,1476.02 U6.19@537.8,1476.02
NetR114_2: R114.2 U7.43 | length 525.7
  Top Layer w10: R114.2@1191.5,1700 1384.14,1700 1390,1705.86 1390,1854.14 1395.86,1860 1560.47,1860 U7.43@1562.99,1857.48
NetR115_1: R115.1 U7.6 | length 537.1
  Top Layer w10: U7.6@1937.01,1857.48 2114.14,1857.48 2120,1851.62 2120,1705.86 2125.86,1700 R115.1@2323.5,1700
NetR116_2: R116.2 U7.41 | length 511.2
  Top Layer w10: R116.2@1191.5,1760 1364.14,1760 1370,1765.86 1370,1900 1377.48,1907.48 U7.41@1562.99,1907.48
NetR117_1: R117.1 U7.8 | length 527.1
  Top Layer w10: U7.8@1937.01,1907.48 2134.14,1907.48 2140,1901.62 2140,1765.86 2145.86,1760 R117.1@2323.5,1760
NetR118_2: R118.2 U7.40 | length 484.4
  Top Layer w10: R118.2@1191.5,1820 1344.14,1820 1350,1825.86 1350,1930 1358.92,1938.92 1527.76,1938.92 1534.15,1932.52 U7.40@1562.99,1932.52
NetR119_1: R119.1 U7.9 | length 489.2
  Top Layer w10: U7.9@1937.01,1932.52 2144.14,1932.52 2155,1921.66 2155,1825.86 2160.86,1820 R119.1@2323.5,1820
NetR120_2: R120.2 U7.38 | length 467.2
  Top Layer w10: R120.2@1191.5,1880 1324.14,1880 1330,1885.86 1330,1976.66 1335.86,1982.52 U7.38@1562.99,1982.52
NetR121_1: R121.1 U7.11 | length 482.2
  Top Layer w10: U7.11@1937.01,1982.52 2164.14,1982.52 2170,1976.66 2170,1885.86 2175.86,1880 R121.1@2323.5,1880
NetR122_2: R122.2 U7.37 | length 432.1
  Top Layer w10: R122.2@1191.5,1940 1305.27,1940 1311.13,1945.86 1311.13,2001.62 1316.99,2007.48 U7.37@1562.99,2007.48
NetR123_1: R123.1 U7.12 | length 447.1
  Top Layer w10: U7.12@1937.01,2007.48 2192.28,2007.48 2198.14,2001.62 2198.14,1945.86 2204,1940 R123.1@2323.5,1940
NetR124_2: R124.2 U7.36 | length 397.2
  Top Layer w10: R124.2@1191.5,2000 1284.14,2000 1290,2005.86 1290,2026.66 1295.86,2032.52 U7.36@1562.99,2032.52
NetR125_1: R125.1 U7.13 | length 412.2
  Top Layer w10: U7.13@1937.01,2032.52 2214.14,2032.52 2220,2026.66 2220,2005.86 2225.86,2000 R125.1@2323.5,2000
NetR126_2: R126.2 U7.35 | length 372.5
  Top Layer w10: R126.2@1191.5,2060 1194.02,2057.48 U7.35@1562.99,2057.48
NetR127_1: R127.1 U7.14 | length 387.5
  Top Layer w10: U7.14@1937.01,2057.48 2320.98,2057.48 R127.1@2323.5,2060
NetR128_2: R128.2 U7.33 | length 376.7
  Top Layer w10: R128.2@1191.5,2120 1270,2120 1282.52,2107.48 U7.33@1562.99,2107.48
NetR129_1: R129.1 U7.16 | length 391.7
  Top Layer w10: U7.16@1937.01,2107.48 2227.48,2107.48 2240,2120 R129.1@2323.5,2120
NetR130_2: R130.2 U7.32 | length 415.5
  Top Layer w10: R130.2@1191.5,2180 1296.5,2180 1296.5,2138.38 1302.36,2132.52 U7.32@1562.99,2132.52
NetR131_1: R131.1 U7.17 | length 416.9
  Top Layer w10: U7.17@1937.01,2132.52 2166.66,2132.52 2190,2155.86 2190,2174.14 2195.86,2180 R131.1@2323.5,2180
NetR132_2: R132.2 U7.30 | length 422.1
  Top Layer w10: R132.2@1191.5,2240 1314.14,2240 1320,2234.14 1320,2188.38 1325.86,2182.52 U7.30@1562.99,2182.52
NetR133_1: R133.1 U7.19 | length 440.7
  Top Layer w10: U7.19@1937.01,2182.52 1939.53,2180 2169.14,2180 2175,2185.86 2175,2234.14 2180.86,2240 R133.1@2323.5,2240
NetR134_2: R134.2 U7.29 | length 457.2
  Top Layer w10: R134.2@1191.5,2300 1344.14,2300 1350,2294.14 1350,2213.34 1355.86,2207.48 U7.29@1562.99,2207.48
NetR135_1: R135.1 U7.20 | length 472.2
  Top Layer w10: U7.20@1937.01,2207.48 2154.14,2207.48 2160,2213.34 2160,2294.14 2165.86,2300 R135.1@2323.5,2300
NetR136_2: R136.2 U7.27 | length 467.2
  Top Layer w10: R136.2@1191.5,2360 1374.14,2360 1380,2354.14 1380,2263.34 1385.86,2257.48 U7.27@1562.99,2257.48
NetR137_1: R137.1 U7.22 | length 481.2
  Top Layer w10: U7.22@1937.01,2257.48 2137.48,2257.48 2145,2265 2145,2354.14 2150.86,2360 R137.1@2323.5,2360
NetR138_2: R138.2 U7.26 | length 502.1
  Top Layer w10: R138.2@1191.5,2420 1404.14,2420 1410,2414.14 1410,2288.38 1415.86,2282.52 U7.26@1562.99,2282.52
NetR139_1: R139.1 U7.23 | length 517.1
  Top Layer w10: U7.23@1937.01,2282.52 2124.14,2282.52 2130,2288.38 2130,2414.14 2135.86,2420 R139.1@2323.5,2420
P_RXD: R45.1 U6.1 | length 6721.8
  Top Layer w10: U6.1@262.2,1706.34 203.66,1706.34 160,1750 65.86,1750 60,1744.14 60,1320 150,1230 209.59,1230 219.59,1240 v1(290,1240) ; v1(520,1210) 520,1170 540,1150 540,435.86 545.86,430 2940,430 2970,400 3910,400 3940,430 3940,1339.14 4000.86,1400 R45.1@4357.01,1400
  Bottom Layer w10: v1(290,1240) 416.17,1240 446.17,1210 v1(520,1210)
P_TXD: R42.1 U6.5 | length 6594.2
  Top Layer w10: v1(170,1290) 130,1290 80,1340 80,1564.14 85.86,1570 180,1570 213.98,1603.98 U6.5@262.2,1603.98 ; v1(520,1290) 564.14,1290 570,1284.14 570,1125 555,1110 555,450.86 560.86,445 2955,445 2985,415 3883.79,415 3920,451.21 3920,1420 3960,1460 R42.1@4358.5,1460
  Bottom Layer w10: v1(170,1290) v1(520,1290)
Page_Register: J5.12 R13.2 | length 2142.2
  Top Layer w10: J5.12@4700,300 4700,750 4750,800 v1(5100,800) ; R13.2@4990,1961.5 v1(5100,1961.5)
  Bottom Layer w10: v1(5100,800) v1(5100,1961.5)
PGM_Mode: J5.2 R1.1 R25.2 U4.17 | length 9433
  Top Layer w10: U4.17@739.76,2738.39 741.38,2740 914.14,2740 920,2745.86 920,3024.14 925.86,3030 v1(1030,3030) ; J5.2@4200,300 4200,580 4235,615 4235,873.54 4246.46,885 4823.79,885 4981.22,1042.43 4982.52,1042.43 5139.96,1199.87 5139.96,1344.1 5145.86,1350 5240,1350 5280,1390 5502.84,1390 5508.7,1395.86 5508.7,1765.44 5499.14,1775 5355,1775 5310,1730 5310,1578.5 ; R25.2@5161.5,1600 5250,1600 5271.5,1578.5 5310,1578.5 ; v1(5310,1530) 5354.14,1530 5360,1535.86 R1.1@5360,1578.5 5310,1578.5
  Bottom Layer w10: v1(1030,3030) 1070,3070 4994.14,3070 5000,3064.14 5000,2913.64 5280,2633.64 5280,1746.46 5310,1716.46 v1(5310,1530)
PRGM_RAM_ROM: J5.4 R21.2 R87.1 U5.4 | length 6421.2
  Top Layer w10: U5.4@3360.24,2748.39 3358.62,2750 3120,2750 3080,2710 3080,2550.86 3085.86,2545 4084.14,2545 4090,2550.86 v1(4090,2700) R87.1@4090,2968.5 ; J5.4@4300,300 4300,840 4330,870 4830,870 4987.44,1027.43 4988.74,1027.43 5160,1198.7 5160,1260 5200,1300 v1(5270,1300) ; R21.2@5161.5,1660 v1(5230,1660)
  Bottom Layer w10: v1(4090,2700) 4090,2790 4143.79,2843.79 5027.43,2843.79 5155,2716.21 5155,2423.79 5235,2343.79 5235,1665 v1(5230,1660) 5235,1655 5235,1555 5200,1520 5200,1380 5270,1310 v1(5270,1300)
PRGM_RAM_ROM_CS: J5.6 R17.2 R95.1 | length 4538
  Top Layer w10: v1(4160,2780) R95.1@4160,2968.5 ; J5.6@4400,300 4400,849.14 4405.86,855 4836.21,855 4993.65,1012.43 4994.95,1012.43 5180,1197.49 5180,1214.14 5185.86,1220 5244.14,1220 5246.49,1217.65 5262.35,1217.65 v1(5270,1210) ; v1(5160,1800) 5160,1721.5 R17.2@5161.5,1720
  Bottom Layer w10: v1(4160,2780) 4208.79,2828.79 5021.21,2828.79 5140,2710 5140,2417.57 5220,2337.57 5220,1810 5210,1800 v1(5160,1800) 5160,1398.79 5210,1348.79 5210,1270 v1(5270,1210)
RWB: J5.10 R96.1 R111.2 U5.2 | length 5278
  Top Layer w10: U5.2@3360.24,2799.57 3489.57,2799.57 3500,2789.13 3500,2565.86 3505.86,2560 4034.14,2560 4040,2565.86 v1(4040,2610) ; v1(4150,2610) 4210,2610 4230,2630 R96.1@4230,2970 ; v1(4800,1030) 4807.65,1037.65 4827.65,1037.65 4850,1060 R111.2@4850,1198.5
  Bottom Layer w10: v1(4040,2610) v1(4150,2610) 4142.35,2617.65 4142.35,2654.14 4136.49,2660 3936.46,2660 3915,2638.54 3915,2135 3910,2130 3910,2128.79 3840.36,2059.14 3840.36,2048.43 4033.79,1855 4033.79,1255.86 4039.64,1250 4168.79,1250 4195,1223.79 4195,1100.86 4205.86,1090 4328.79,1090 4365,1053.79 4365,955.86 4370.86,950 4750,950 ; J5.10@4600,300 4600,800 4750,950 ; v1(4800,1030) 4800,970 4780,950 4750,950
SystemClock: R57.1 R112.2 | length 1047.8
  Top Layer w10: v1(4720,1030) 4790,1100 R112.2@4790,1198.5 ; R57.1@4900,631.5 4901.5,630 v1(4990,630)
  Bottom Layer w10: v1(4720,1030) 4724.14,1030 4730,1035.86 4730,1080 4740,1090 4954.14,1090 4990,1054.14 v1(4990,630)
TLA_clock: J4.1 R32.1 | length 625.8
  Top Layer w10: v1(4240,1520) R32.1@4358.5,1520
  Bottom Layer w10: v1(4240,1520) 4290,1570 4290,1934.14 4295.86,1940 J4.1@4360,1940
UPDI: J1.2 R5.2 | length 258.5
  Top Layer w10: R5.2@5191.5,2300 J1.2@5450,2300
USBDM: J9.2 U6.16 | length 623.1
  Top Layer w10: J9.2@298.43,1008.11 300.31,1010 420,1010 420,1388.5 430.75,1399.25 U6.16@537.8,1399.25
USBDP: J9.3 U6.15 | length 624.2
  Top Layer w10: J9.3@298.43,976.61 420,976.61 435,991.61 435,1367.8 440.86,1373.66 U6.15@537.8,1373.66
pads on no net: J9.10 J9.11 U5.3 U5.5 U5.7 U5.9 U5.11 U5.13 U5.15 U5.17 U6.2 U6.3 U6.6 U6.8 U6.9 U6.10 U6.11 U6.12 U6.13 U6.14 U6.24 U6.27 U6.28 X1.1 X1.6

## Polygon pours and split planes (outlines as drawn)
GND on Plane(Gnd) (split plane): 5579.9,20.1 20.1,20.1 20.1,3979.9 5579.9,3979.9
+5 on Plane(Power) (split plane): 5579.9,20.1 20.1,20.1 20.1,3979.9 5579.9,3979.9

## Silkscreen, mask and mechanical layers (free items; w line width, h text height)
Top Overlay:
  lines w10: 350,3480 1950,3480 1950,3620 350,3620 350,3480 ; 350,3640 4260,3640 4260,3740 350,3740 350,3640 ; 1970,3480 2805,3480 2805,3620 1970,3620 1970,3480 ; 2820,3480 3490,3480 3490,3620 2820,3620 2820,3480 ; 3510,3480 4260,3480 4260,3620 3510,3620 3510,3480
  text "P/N PGMER V2 32958" at 4480,3850 h40
  text "ABS Data Systems, Inc, (c) Copyright 2025" at 1410,3829.99 h60
  text "Address" at 1020,3670 h40
  text "Data" at 2320,3670 h40
  text "PGM" at 2970,3670 h40
  text "Control" at 3700,3670 h40
  text "JLink" at 4092.46,3513.93 h30 r35
  text "A14" at 440,3504.14 h40 r45
  text "A13" at 550,3504.14 h40 r45
  text "A12" at 650,3504.14 h40 r45
  text "A11" at 750,3504.14 h40 r45
  text "A10" at 850,3504.14 h40 r45
  text "A9" at 950,3504.14 h40 r45
  text "A8" at 1050,3504.14 h40 r45
  text "A7" at 1150,3504.14 h40 r45
  text "A6" at 1250,3504.14 h40 r45
  text "A5" at 1350,3504.14 h40 r45
  text "A4" at 1450,3504.14 h40 r45
  text "A3" at 1550,3504.14 h40 r45
  text "A2" at 1650,3504.14 h40 r45
  text "A1" at 1750,3504.14 h40 r45
  text "A0" at 1850,3504.14 h40 r45
  text "D7" at 2020,3504.14 h40 r45
  text "D6" at 2120,3504.14 h40 r45
  text "D5" at 2220,3504.14 h40 r45
  text "D4" at 2320,3504.14 h40 r45
  text "D3" at 2420,3504.14 h40 r45
  text "D2" at 2520,3504.14 h40 r45
  text "D1" at 2620,3504.14 h40 r45
  text "D0" at 2730,3504.14 h40 r45
  text "PG1" at 3100,3504.14 h35 r45
  text "LAC" at 3200,3504.14 h35 r45
  text "HAC" at 3300,3504.14 h35 r45
  text "nBOE" at 3572.46,3503.93 h30 r35
  text "nOE" at 3672.46,3503.93 h30 r35
  text "nCE" at 3772.46,3503.93 h30 r35
  text "nWE" at 3872.46,3503.93 h30 r35
  text "nHrst" at 3972.46,3503.93 h30 r35
  text "Mode" at 2900,3494.14 h35 r45
  text "PG0" at 3000,3494.14 h35 r45
Mechanical 1:
  the board outline again, w10

## Text inside footprints (layer, text, board x,y; h text height)
J4: Top Overlay "2" at 4250,1820 h50; Top Overlay "1" at 4260,1920 h50
J8: Top Overlay "1" at 170,2070 h50; Top Overlay "2" at 170,1950 h50